# Altium PCB MT32Pi_lite.PcbDoc
Units mm, origin at the board's own origin, x right, y up, seen from the top; angles counter-clockwise.
Board outline 30.17 x 83.74 mm, 2 copper layers (F.Cu, B.Cu), stack 1.671 mm thick; 6 components, 13 nets, 62 pads, 18 vias.
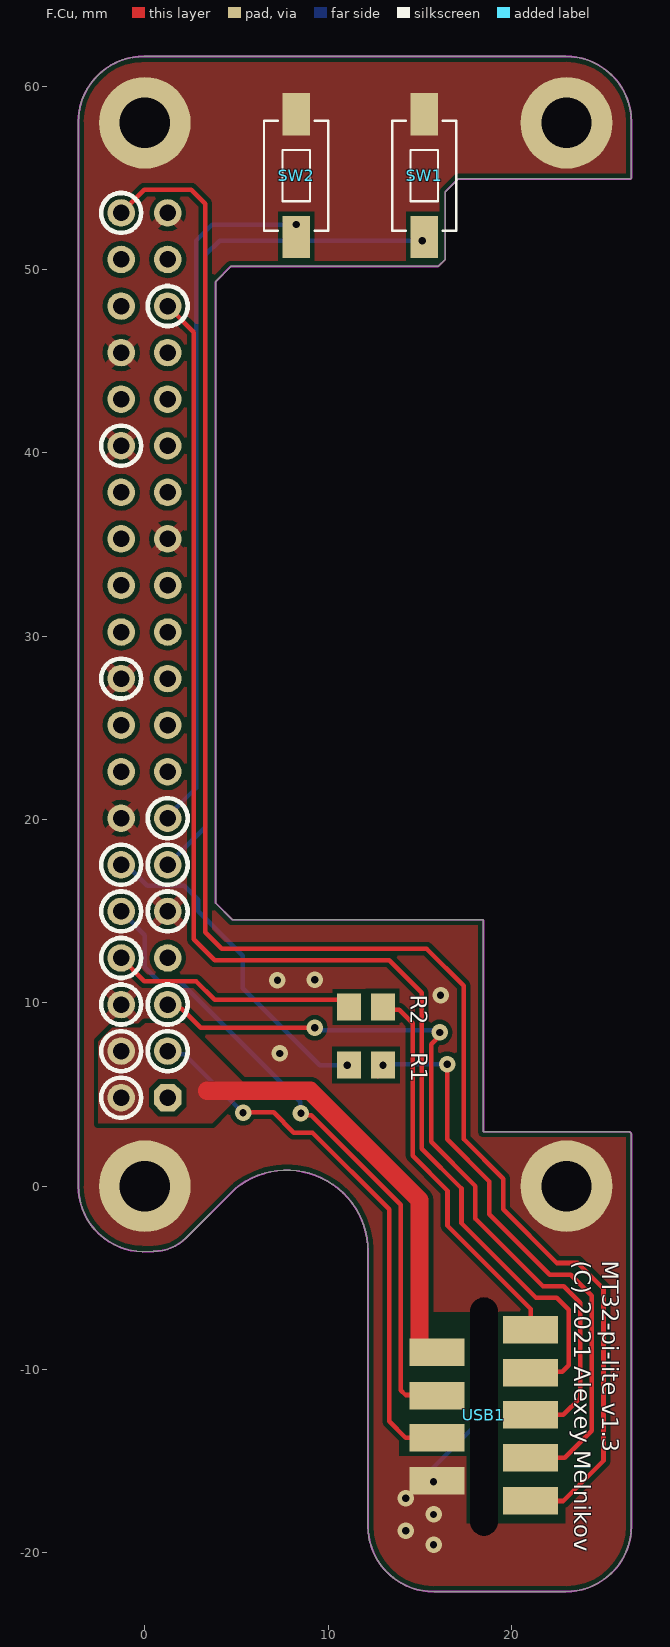
[diagram p0: F.Cu view]
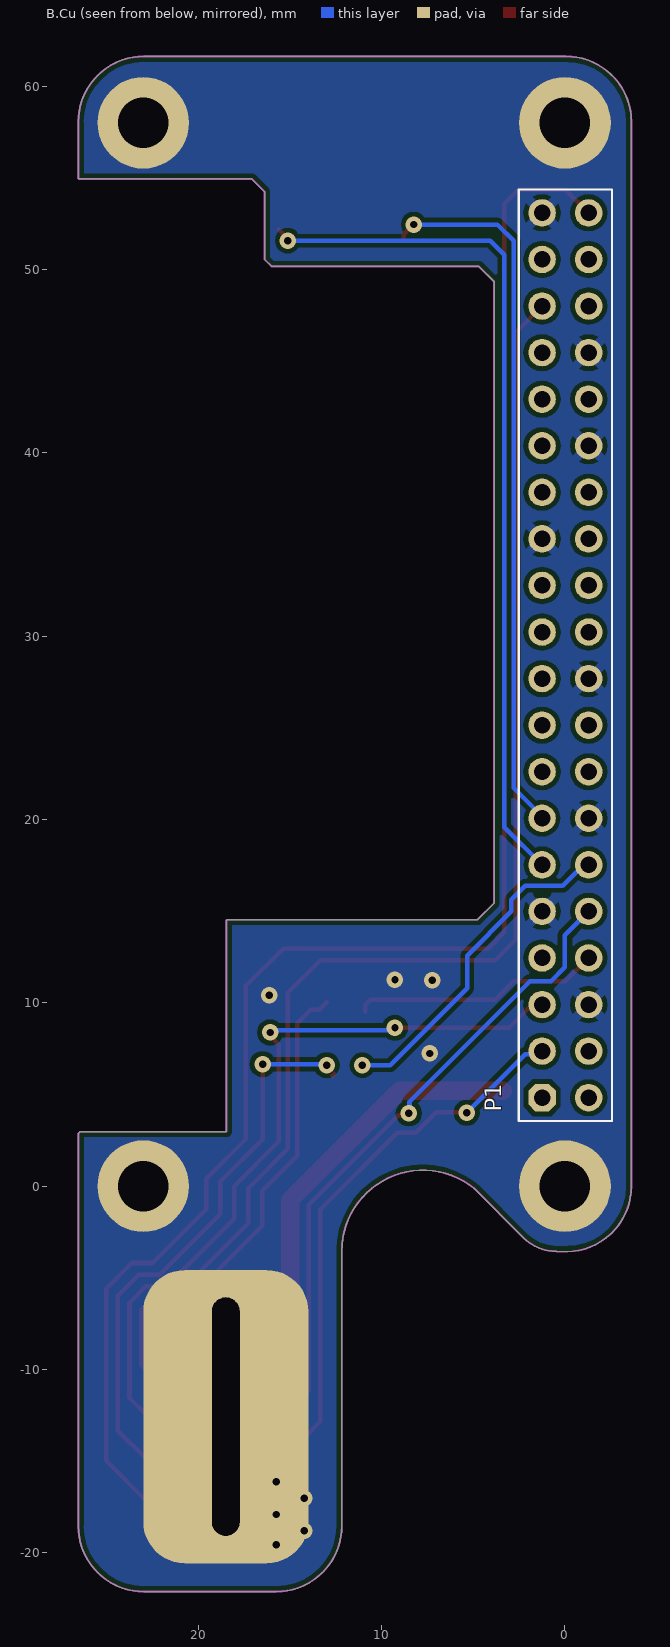
[diagram p1: B.Cu view, seen from below]
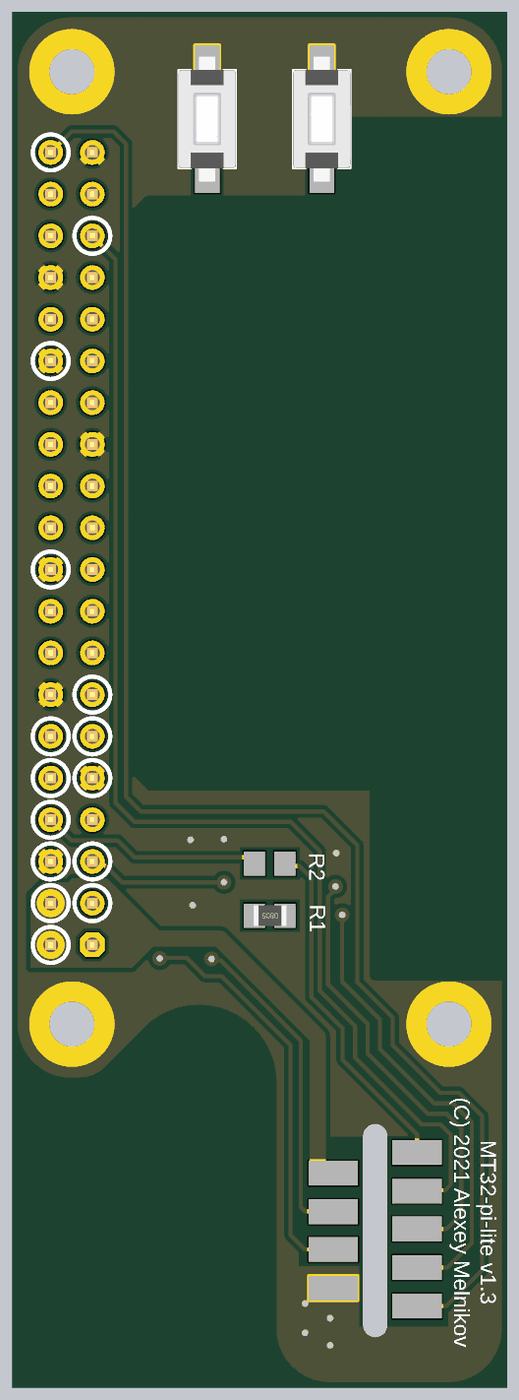
[diagram p2: 3D render of the assembled board from above, using the file's embedded part models]

## Layer stack, top to bottom
F.Mask: solder mask 0.0102, Solder Resist, Dk 3.5
F.Cu: signal copper 0.0356
Dielectric 1: dielectric 1.6, FR-4, Dk 4.8
B.Cu: signal copper 0.0356
B.Mask: solder mask 0.0102, Solder Resist, Dk 3.5

## Board outline
-0.127,-3.575 0.468,-3.556 ccw(c0.468,-1.016) 2.264,-2.812 4.951,-0.125 cw(c7.747,-3.556) 12.173,-3.556 12.172,-3.605 12.172,-18.542 ccw(c15.748,-18.542) 15.748,-22.118 22.965,-22.118 ccw(c22.965,-18.542) 26.541,-18.542 26.541,2.846 ccw(c26.492,2.847) 26.526,2.882 26.452,2.957 ccw(c26.417,2.922) 26.416,2.971 18.465,2.971 18.465,14.478 ccw(c18.415,14.478) 18.415,14.528 4.776,14.528 3.86,15.444 3.86,49.326 4.699,50.165 16.002,50.165 16.383,50.546 16.383,54.229 17.095,54.941 26.491,54.941 ccw(c26.491,54.991) 26.541,54.991 26.541,58.05 ccw(c22.965,58.05) 22.965,61.626 -0.05,61.626 ccw(c-0.05,58.05) -3.626,58.05 -3.626,0 ccw(c-0.05,0)

## Design rules (kind name [scope] priority, off if disabled: settings)
Clearance "Clearence Polygon" [All] p1: gap=0.254 ignorepadtopadclearanceinfootprint=FALSE
HoleSize "Hole Size (Default)" [All] p1: absolutevalues=TRUE maxlimit=10 minlimit=0.3 maxpercent=80.000 minpercent=20.000
MinimumSolderMaskSliver [All] p1: minsoldermaskwidth=0
PlaneClearance [All] p1: clearance=0.254
PolygonConnect ConnectDefault [All vs InComponent('P1') and InNet('GND')] p1: connectstyle=Relief reliefconductorwidth=0.508 reliefentries=4 polygonreliefangle="45 Angle" airgapwidth=0.254
PolygonConnect ConnectDefault_1 [All] p2: connectstyle=Direct reliefconductorwidth=0.5 reliefentries=4 polygonreliefangle="45 Angle" airgapwidth=0.254
RoutingVias [All] p1: holewidth=0.4 width=0.9 viastyle="Through Hole" minholewidth=0.3 minwidth=0.8 maxholewidth=1 maxwidth=1.5
SilkToSilkClearance [All] p1: silktosilkclearance=0
SilkToSolderMaskClearance [IsPad] p1: minsilkscreentomaskgap=0 clearancetoexposedcopper=TRUE
SolderMaskExpansion [All] p1: expansion=0.102 istentingtop=FALSE
Width [All] p1: maxlimit=10 minlimit=0.2 preferedwidth=0.25 minimp=50.000000 maximp=50.000000 favimp=50.000000
25 further rules are at their usual default settings.

## Components (designator, comment, footprint, x,y, rotation, side; value= is the part's Value field where it differs from the comment)
P1 "Header 20X2" HDR20x2 1.248,4.826 r90 bottom locked
R1 "100" R0805 12.065,6.604 r180 top
R2 "100" "R0805 - DNI" 12.065,9.779 r0 top
SW1 "Tact_60X35" TACT_60X35 15.24,55.118 r270 top
SW2 "Tact_60X35" TACT_60X35 8.255,55.118 r270 top
USB1 "USBA30-PTH" USB3-A-M-PTH 18.5,-12.573 r270 top

## Footprints (in the part's own frame and the unit in brackets; to place one, negate y for a bottom-side part, rotate by r counter-clockwise, add the part's x,y. Pads: shape width x height; smd on the part's side, far side on the other; paste and mask are expansions set on the pad)
HDR20x2 [mm] "Header, Vertical Receptacle, 2.54 mm pitch; 0.65 mm lead width, 40 pins, 2 rows, 20 pins per row, 50.80 mm L X 5.08 mm W X 11.00 mm H body"
  oct 1.5x1.5 hole 0.9 paste-1.5: 1(0,0)
  round 1.5 hole 0.9 paste-1.5: 2(0,-2.54) 3(2.54,0) 4(2.54,-2.54) 5(5.08,0) 6(5.08,-2.54) 7(7.62,0) 8(7.62,-2.54) 9(10.16,0) 10(10.16,-2.54) 11(12.7,0) 12(12.7,-2.54) 13(15.24,0) 14(15.24,-2.54) 15(17.78,0) 16(17.78,-2.54) 17(20.32,0) 18(20.32,-2.54) 19(22.86,0) 20(22.86,-2.54) 21(25.4,0) 22(25.4,-2.54) 23(27.94,0) 24(27.94,-2.54) 25(30.48,0) 26(30.48,-2.54) 27(33.02,0) 28(33.02,-2.54) 29(35.56,0) 30(35.56,-2.54) 31(38.1,0) 32(38.1,-2.54) 33(40.64,0) 34(40.64,-2.54) 35(43.18,0) 36(43.18,-2.54) 37(45.72,0) 38(45.72,-2.54) 39(48.26,0) 40(48.26,-2.54)
  silkscreen extent -1.27,-3.81 49.53,1.27, body extent -1.27,-3.81 49.53,1.27, height 11
R0805 [mm] "Resistor, Chip; 2.32 mm L X 1.25 mm W X 1.00 mm H body"
  rect 1.29x1.47 smd: 1(-0.93,0) 2(0.93,0)
  body extent -1.03,-0.62 0.97,0.63, height 0.42
"R0805 - DNI" [mm] "Resistor, Chip; 2.32 mm L X 1.25 mm W X 1.00 mm H body"
  rect 1.29x1.47 smd: 1(-0.93,0) 2(0.93,0)
TACT_60X35 [mm] "6.0*3.5mm vertical type, SMD, height 5.0mm, white actuator, 260gf, T&R"
  rect 2.3x1.5 smd: 1(-3.35,0) 2(3.35,0)
  silkscreen extent -3,-1.75 3,1.75, body extent -3.8,-1.75 3.8,1.75, height 5
USB3-A-M-PTH [mm] "USB3-A-M-PTH"
  rect 1.5x3 smd: D+(1.15,-2.55) D-(-1.15,-2.55) GND(3.5,-2.55) GND2(-0.1,2.55) RX+(2.25,2.55) RX-(4.6,2.55) TX+(-4.75,2.55) TX-(-2.4,2.55) VBUS(-3.5,-2.55)
  rrect50% 0x0 / inner rrect50% 0x0 / far side rrect50% 16x9 hole 1.5 slot 13 at 0 deg unplated: GND(0,0)

## Part data
P1: "Header, 20-Pin, Dual row", LatestRevisionDate=17-Jul-2002, LatestRevisionNote="Re-released for DXP Platform.", Publisher="Altium Limited"
R1 R2: library part ERJ6RS, "Low Ohmic Value Thick Film Chip Resistor, 0.1 Ohm to 0.2 Ohm Range, 1%, 2% and 5% Tolerance, 0805 Size, 0.125 W", PackageDocument=Mar-2003, Code_IPC="2012 [0805]", ComponentLink1Description="Manufacturer Link", ComponentLink1URL=http://www.panasonic.com/industrial/components/resistive_products.htm, ComponentLink2Description=Datasheet, ComponentLink2URL=http://www.panasonic.com/industrial/components/pdf/AOA0000CE3.pdf, LatestRevisionDate=19-Mar-2004, LatestRevisionNote="Silkscreen size reduced.", PackageReference=6-0805, Published=17-Dec-2003, Publisher="Altium Limited"
SW1 SW2: "Tact 6.0mm X 3.5mm", PartNumber=434111050826, ComponentLink1Description="Manufacturer URL", ComponentLink1URL=http://www.we-online.com, ComponentLink2Description=Datasheet, ComponentLink2URL=http://katalog.we-online.de/em/datasheet/434111050826.pdf, NoPins=02, PackageReference=434111050826
USB1: USB=USB

## Free pads (board coordinates)
  round 5 hole 2.75: ""(0,0) ""(0,58) ""(23,0) ""(23,58)

## Via types
v1: diameter 0.9, hole 0.4, F.Cu to B.Cu, tented both sides, 18 vias

## Nets (pads, with @x,y where several pads share a name; then routed paths per layer and width w, separated by ;. In a path a pad name is that pad's centre, name@x,y a point inside that pad or via, vN(x,y) a via of type N, cw(c..) or ccw(c..) an arc to the next point about the centre after c; other vN are vias at no path point)
BTN1: P1.11 SW1.2 | length 47.1
  F.Cu w0.25: v1(15.124,51.576) 15.124,51.7 SW1.2@15.621,52.197
  B.Cu w0.25: P1.11 3.302,19.58 3.302,50.8 4.078,51.576 v1(15.124,51.576)
BTN2: P1.13 SW2.2 | length 38.9
  F.Cu w0.25: v1(8.255,52.451) 8.792,51.914 SW2.2@8.792,51.739
  B.Cu w0.25: P1.13 1.248,20.171 2.794,21.717 2.794,51.562 3.683,52.451 v1(8.255,52.451)
GND: P1.6 P1.9 P1.14 P1.20 P1.25 P1.30 P1.34 P1.39 pad. SW1.1 SW2.1 USB1.GND | length 8.5
  F.Cu w0.25: USB1.GND@14.986,-15.875 15.24,-16.129 v1(15.748,-16.129) ; 18.5,-15.536 18.5,-15.409
  B.Cu w0.25: v1(15.748,-16.129) 15.748,-15.325 18.5,-12.573 USB1.GND@18.5,-15.409
  other v1: 15.748,-19.558 14.224,-18.796 15.748,-17.907 14.224,-17.018 7.366,7.239 16.129,10.414 7.237,11.229 9.27,11.264
NetP1_12: P1.12 R1.2 | length 18.6
  F.Cu w0.25: R1.2@10.795,6.731 10.929,6.597 v1(11.046,6.597)
  B.Cu w0.25: P1.12 -1.016,17.526 0.127,16.383 2.159,16.383 2.921,15.621 2.921,14.986 5.334,12.573 5.334,10.795 9.532,6.597 v1(11.046,6.597)
NetR2_2: R2.2 USB1.TX+ | length 21.5
  F.Cu w0.25: R2.2@12.995,10.033 13.402,9.626 13.869,9.626 14.605,8.89 14.605,1.651 16.51,-0.254 16.51,-2.159 21.05,-6.699 USB1.TX+
PCM_CLK: R1.1 USB1.RX+ | length 31.7
  F.Cu w0.25: R1.1@12.594,6.117 R1.1@12.7,6.01 ; v1(16.488,6.654) 16.488,2.562 18.796,0.254 18.796,-1.529 22.093,-4.826 23.241,-4.826 24.384,-5.969 24.384,-13.335 22.896,-14.823 USB1.RX+
  B.Cu w0.25: v1@13.117,6.482 v1(12.995,6.604) 13.045,6.654 v1(16.488,6.654)
PCM_DOUT: P1.40 USB1.RX- | length 95.1
  F.Cu w0.25: P1.40 -0.022,54.356 2.54,54.356 3.302,53.594 3.302,13.843 4.191,12.954 15.367,12.954 17.399,10.922 17.399,2.569 19.558,0.41 19.558,-1.27 22.479,-4.191 23.622,-4.191 25.019,-5.588 25.019,-14.986 22.832,-17.173 USB1.RX-
PCM_FS: P1.35 USB1.TX- | length 75.3
  F.Cu w0.25: P1.35 2.667,46.587 2.667,13.462 3.81,12.319 13.335,12.319 15.113,10.541 15.113,2.032 17.272,-0.127 17.272,-2.032 21.336,-6.096 22.479,-6.096 23.114,-6.731 23.114,-9.779 22.779,-10.114 21.109,-10.114 USB1.TX-
RXD: P1.10 USB1.D- | length 35.5
  F.Cu w0.25: v1(8.515,3.97) 8.614,3.871 9.083,3.871 13.97,-1.016 13.97,-11.14 14.221,-11.391 15.918,-11.391 USB1.D-
  B.Cu w0.25: P1.10 0,13.694 0,11.938 0.762,11.176 1.905,11.176 8.48,4.601 8.48,4.005 v1(8.515,3.97)
SCL: P1.5 USB1.GND2 | length 42.9
  F.Cu w0.25: P1.5 1.487,9.667 2.017,9.667 3.048,8.636 v1(9.271,8.636) ; v1(16.08,8.382) 16.08,8.304 16.129,8.255 15.621,7.747 15.621,2.413 18.034,0 18.034,-1.778 21.717,-5.461 22.86,-5.461 23.749,-6.35 23.749,-11.557 22.833,-12.473 USB1.GND2
  B.Cu w0.25: v1(9.271,8.636) 9.395,8.512 9.74,8.512 9.742,8.509 15.699,8.509 15.953,8.255 v1(16.08,8.382)
SDA: P1.3 USB1.D+ | length 30.4
  F.Cu w0.25: P1.3 P1.3@1.397,7.366 ; v1(5.358,4.003) 5.378,4.024 7.025,4.024 8.128,2.921 9.144,2.921 13.335,-1.27 13.335,-12.827 14.221,-13.713 15.94,-13.713 USB1.D+
  B.Cu w0.25: P1.3 1.42,7.194 2.167,7.194 v1(5.358,4.003)
TXD: P1.8 R2.1 | length 13.6
  F.Cu w0.25: P1.8 -0.022,11.176 2.794,11.176 3.81,10.16 10.615,10.16 10.881,9.894 R2.1@10.881,9.525
VCC: P1.2 P1.4 USB1.VBUS | length 23.3
  F.Cu w1: P1.2@-1.292,4.721 P1.2 ; 3.394,5.207 9.017,5.207 14.986,-0.762 14.986,-8.823 15.236,-9.073 USB1.VBUS
pads on no net: P1.1 P1.7 P1.15 P1.16 P1.17 P1.18 P1.19 P1.21 P1.22 P1.23 P1.24 P1.26 P1.27 P1.28 P1.29 P1.31 P1.32 P1.33 P1.36 P1.37 P1.38

## Polygon pours and split planes (outlines as drawn)
GND on F.Cu "ground" (solid, remove dead copper, pour order 7): -0.127,-3.575 0.468,-3.556 ccw(c0.468,-1.016) 2.264,-2.812 4.951,-0.125 cw(c7.747,-3.556) 12.173,-3.556 12.172,-3.605 12.172,-18.542 ccw(c15.748,-18.542) 15.748,-22.118 22.965,-22.118 ccw(c22.965,-18.542) 26.541,-18.542 26.541,2.846 ccw(c26.492,2.847) 26.526,2.882 26.452,2.957 ccw(c26.417,2.922) 26.416,2.971 18.465,2.971 18.465,14.478 ccw(c18.415,14.478) 18.415,14.528 4.776,14.528 3.86,15.444 3.86,49.326 4.699,50.165 16.002,50.165 16.383,50.546 16.383,54.229 17.095,54.941 26.491,54.941 ccw(c26.491,54.991) 26.541,54.991 26.541,58.05 ccw(c22.965,58.05) 22.965,61.626 -0.05,61.626 ccw(c-0.05,58.05) -3.626,58.05 -3.626,0 ccw(c-0.05,0)
VCC on F.Cu "power" (solid, remove dead copper, pour order 3): -2.54,7.874 -1.778,8.636 -0.239,8.636 0.015,8.89 2.159,8.89 5.651,5.397 3.683,3.429 -2.54,3.429
GND on B.Cu "ground" (solid, remove dead copper, pour order 8): -0.127,-3.575 0.468,-3.556 ccw(c0.468,-1.016) 2.264,-2.812 4.951,-0.125 cw(c7.747,-3.556) 12.173,-3.556 12.172,-3.605 12.172,-18.542 ccw(c15.748,-18.542) 15.748,-22.118 22.965,-22.118 ccw(c22.965,-18.542) 26.541,-18.542 26.541,2.846 ccw(c26.492,2.847) 26.526,2.882 26.452,2.957 ccw(c26.417,2.922) 26.416,2.971 18.465,2.971 18.465,14.478 ccw(c18.415,14.478) 18.415,14.528 4.776,14.528 3.86,15.444 3.86,49.326 4.699,50.165 16.002,50.165 16.383,50.546 16.383,54.229 17.095,54.941 26.491,54.941 ccw(c26.491,54.991) 26.541,54.991 26.541,58.05 ccw(c22.965,58.05) 22.965,61.626 -0.05,61.626 ccw(c-0.05,58.05) -3.626,58.05 -3.626,0 ccw(c-0.05,0)

## Keep-outs
Edge.Cuts:
  lines w0.1: -3.626,0 ccw(c-0.05,0) -0.127,-3.575 0.468,-3.556 ccw(c0.468,-1.016) 2.264,-2.812 4.951,-0.125 cw(c7.747,-3.556) 12.173,-3.556 12.172,-3.605 12.172,-18.542 ccw(c15.748,-18.542) 15.748,-22.118 22.965,-22.118 ccw(c22.965,-18.542) 26.541,-18.542 26.541,2.846 ccw(c26.492,2.847) 26.526,2.882 26.452,2.957 ccw(c26.417,2.922) 26.416,2.971 18.465,2.971 18.465,14.478 ccw(c18.415,14.478) 18.415,14.528 4.776,14.528 3.86,15.444 3.86,49.326 4.699,50.165 16.002,50.165 16.383,50.546 16.383,52.705 16.383,54.229 17.095,54.941 26.491,54.941 ccw(c26.491,54.991) 26.541,54.991 26.541,58.05 ccw(c22.965,58.05) 22.965,61.626 -0.05,61.626 ccw(c-0.05,58.05) -3.626,58.05 -3.626,0

## Other copper
F.Cu:
  pour cut-out: 13.843,-14.732 17.526,-14.732 17.526,-18.415 22.965,-18.415 22.965,-6.858 13.843,-6.858

## Silkscreen, mask and mechanical layers (free items; w line width, h text height)
F.SilkS:
  circle w0.254: c1.248,17.526 r1.093
  circle w0.254: c1.248,20.066 r1.093
  circle w0.254: c-1.292,27.686 r1.093
  circle w0.254: c-1.292,40.386 r1.093
  circle w0.254: c1.248,48.006 r1.093
  circle w0.254: c-1.292,53.086 r1.093
  circle w0.254: c1.248,7.366 r1.093
  circle w0.254: c-1.292,4.826 r1.093
  circle w0.254: c-1.292,7.366 r1.093
  circle w0.254: c-1.292,17.526 r1.093
  circle w0.254: c-1.292,14.986 r1.093
  circle w0.254: c1.248,14.986 r1.093
  circle w0.254: c1.248,9.906 r1.093
  circle w0.254: c-1.292,9.906 r1.093
  circle w0.254: c-1.292,12.446 r1.093
  text "MT32-pi-lite v1.3 / (C) 2021 Alexey Melnikov" at 23.114,-4.064 h1.52 r270